# Altium PCB PCB1.PcbDoc
Units mm, origin at the board's own origin, x right, y up, seen from the top; angles counter-clockwise.
Board outline 20.7 x 29.34 mm, 2 copper layers (Top Layer, Bottom Layer); 11 components, 9 nets, 37 pads, 3 vias.
Unrouted connection lines stored in the file: 2.
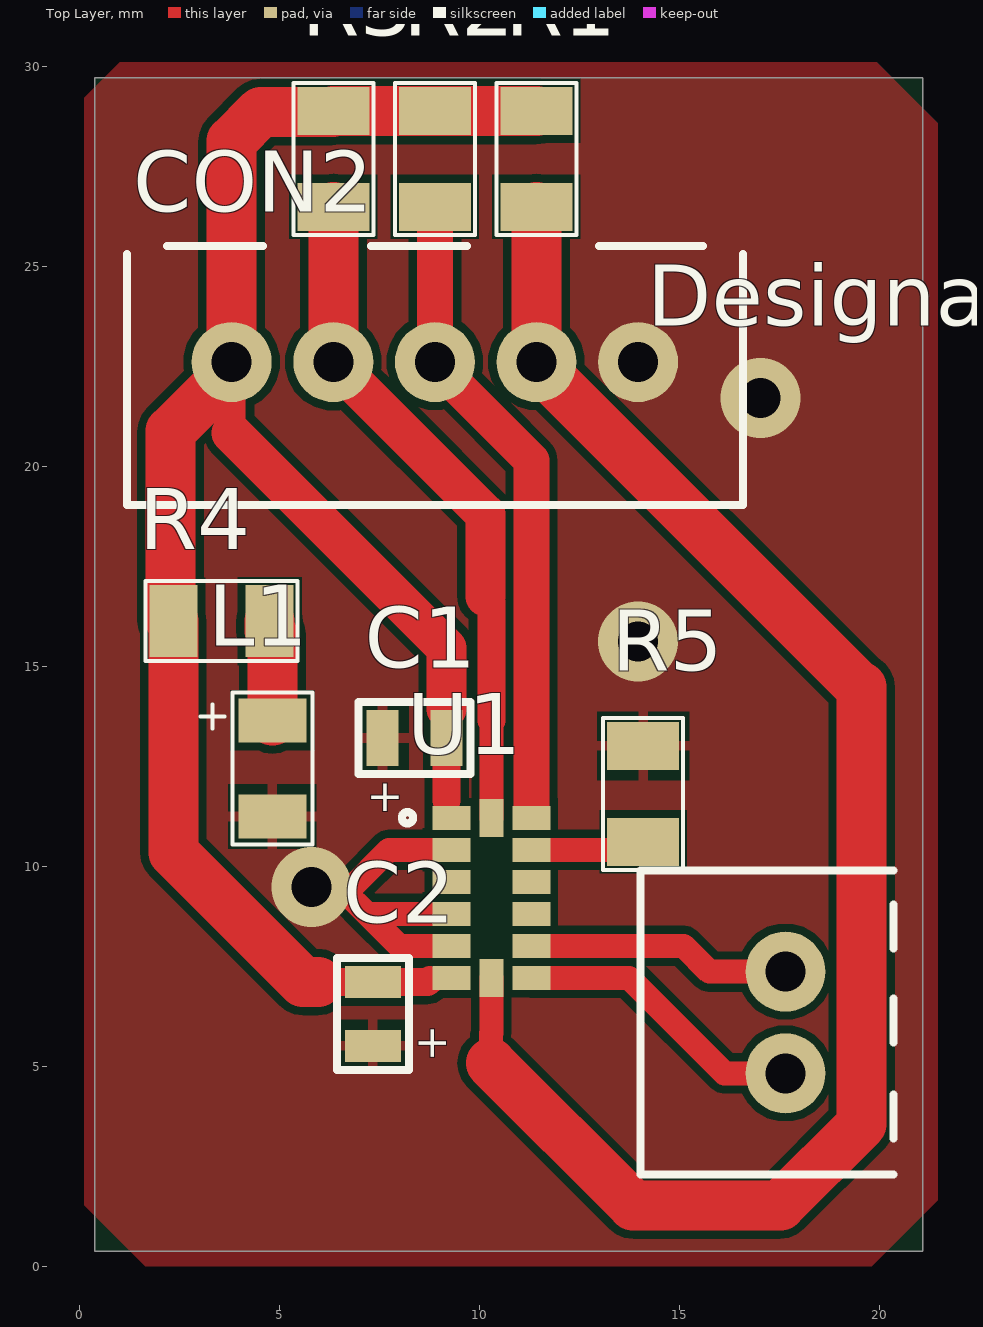
[diagram p0: Top Layer view]
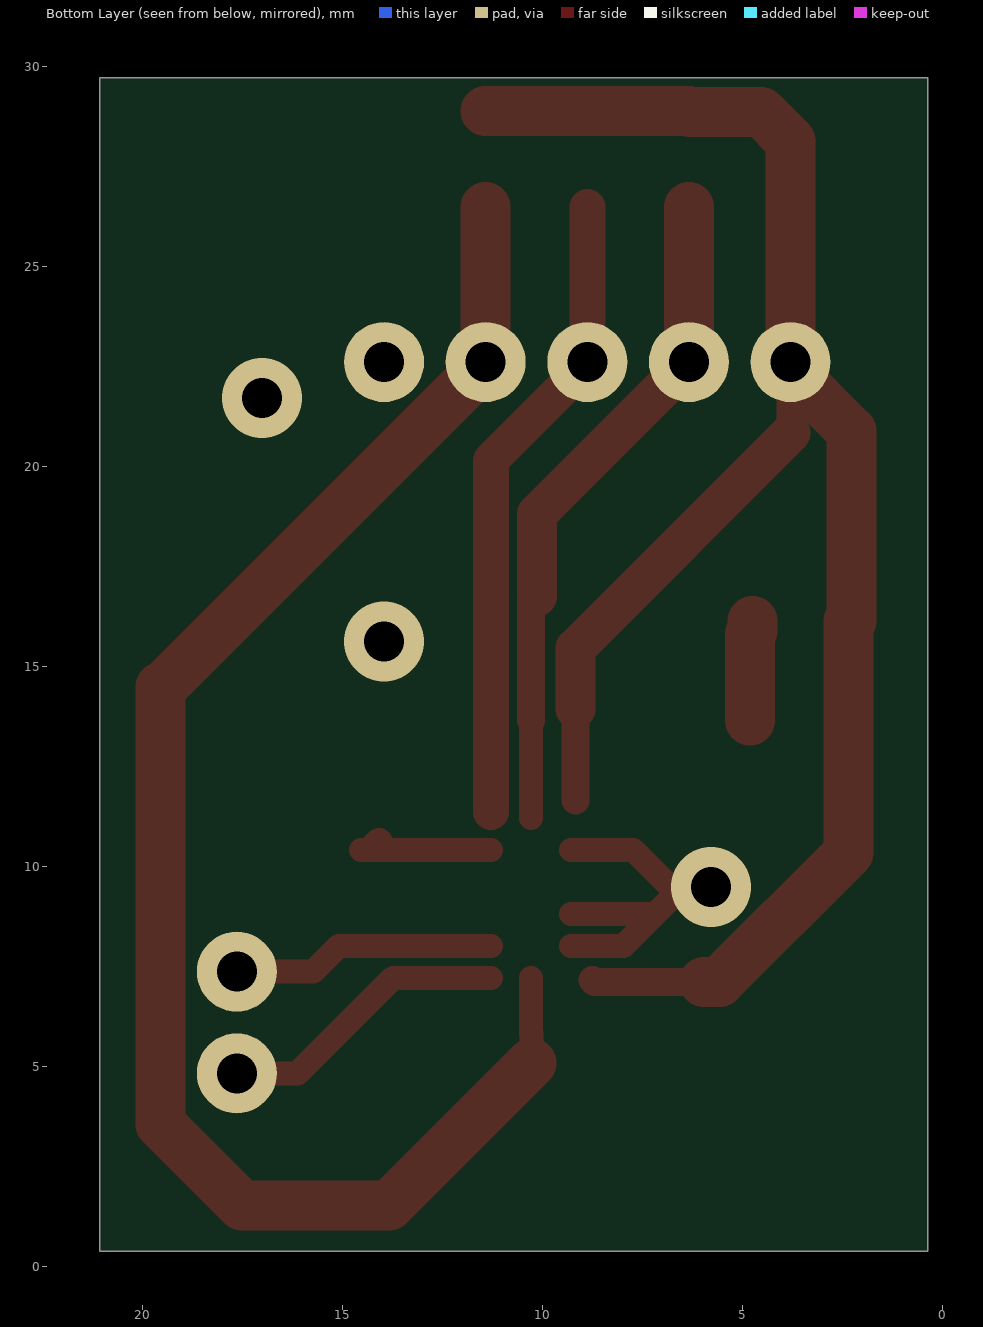
[diagram p1: Bottom Layer view, seen from below]
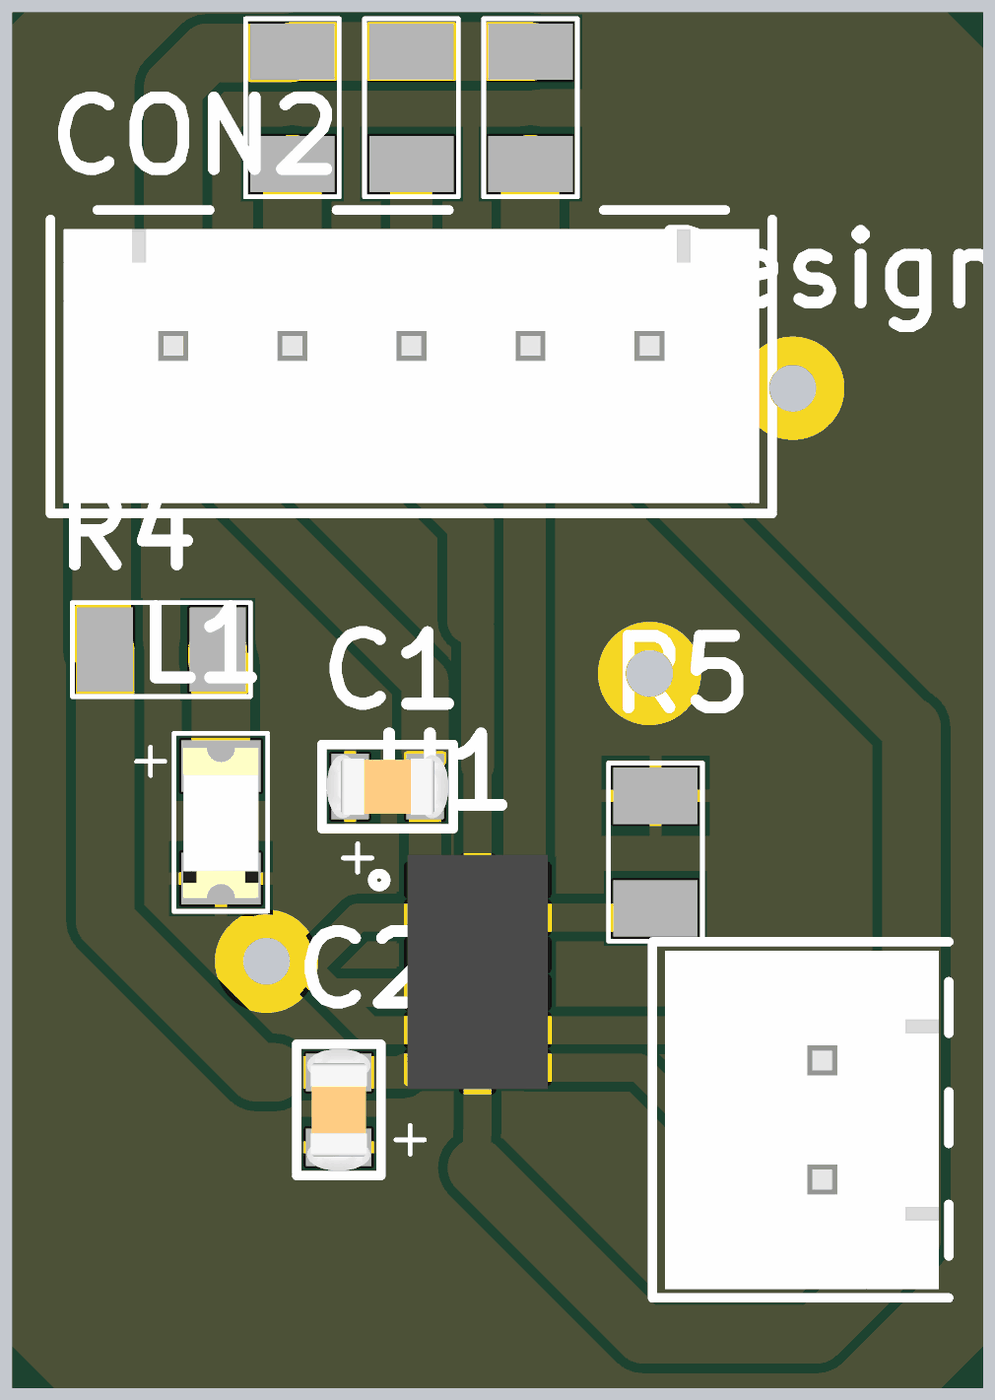
[diagram p2: 3D render of the assembled board from above, using the file's embedded part models]

## Layer stack, top to bottom
Top Solder: solder mask 0.0102, Solder Resist, Dk 3.5
Top Layer: signal copper 0.0356
Dielectric 1: dielectric 0.32, FR-4, Dk 4.8
Bottom Layer: signal copper 0.0356
Bottom Solder: solder mask 0.0102, Solder Resist, Dk 3.5

## Board outline
0.381,0.381 0.381,29.718 21.082,29.718 21.082,0.381

## Design rules (kind name [scope] priority, off if disabled: settings)
Clearance [All] p1: gap=0.2 ignorepadtopadclearanceinfootprint=FALSE
PolygonConnect [All] p1: connectstyle=Relief reliefconductorwidth=0.254 reliefentries=4 polygonreliefangle="90 Angle" airgapwidth=0.254
RoutingVias [All] p1: holewidth=0.711 width=1.27 viastyle="Through Hole" minholewidth=0.711 minwidth=1.27 maxholewidth=0.711 maxwidth=1.27
SolderMaskExpansion [All] p1: expansion=0.102 istentingtop=FALSE
Width [All] p1: maxlimit=1.5 minlimit=0.254 preferedwidth=0.254
30 further rules are at their usual default settings.

## Classes and differential pairs
component class Sheet6: C1 C2 CON2 L1 R1 R2 R3 R4 R5 U1

## Components (designator, comment, footprint, x,y, rotation, side; value= is the part's Value field where it differs from the comment)
C1 "CAP 100nF" CAP_805 8.382,13.208 r0 top
C2 "CAP 10uF" CAP_805 7.34,6.312 r90 top
CON2 "5 PIN CON" "5 PIN 2.54MM" 8.89,22.606 r180 top
Designator154 "Comment" "2 PIN 2.54MM" 17.653,6.096 r90 top
L1 "Led Red" "Led 1206" 4.826,12.446 r270 top
R1 "RES 10K 1206" RES_1206 11.43,27.686 r270 top
R2 "RES 10K 1206" RES_1206 8.89,27.686 r270 top
R3 "RES 10K 1206" RES_1206 6.35,27.686 r270 top
R4 "RES 10K 1206" RES_1206 3.556,16.129 r0 top
R5 "RES 10K 1206" RES_1206 14.097,11.811 r270 top
U1 "ADXL345BCCZ-RL" PQFN80P300X500X79-14N 10.303,9.214 r0 top

## Footprints (in the part's own frame and the unit in brackets; to place one, negate y for a bottom-side part, rotate by r counter-clockwise, add the part's x,y. Pads: shape width x height; smd on the part's side, far side on the other; paste and mask are expansions set on the pad)
"2 PIN 2.54MM" [mm]
  round 2 hole 1 mask+0.05: 1(-1.27,0) 2(1.27,0)
  silkscreen extent -3.79,-2.7 3.8,3.62, body extent -3.61,-2.49 3.61,3.35, height 7.21
"5 PIN 2.54MM" [mm]
  round 2 hole 1 mask+0.05: 1(-5.08,0) 2(-2.54,0) 3(0,0) 4(2.54,0) 5(5.08,0)
  silkscreen extent -7.7,-2.9 7.7,3.57, body extent -7.42,-2.49 7.42,3.35, height 7.21
CAP_805 [mm]
  rect 0.8x1.4 smd mask+0.05: 1(-0.8,0) 2(0.8,0)
  silkscreen extent -1.4,-0.9 1.4,0.9, body extent -1.3,-0.68 1.3,0.68, height 0.9
"Led 1206" [mm]
  rect 1.1x1.7 smd mask+0.05: 1(-1.2,0) 2(1.2,0)
  silkscreen extent -1.9,-1.8 1.9,1, body extent -1.59,-0.8 1.61,0.8, height 1.1
PQFN80P300X500X79-14N [mm]
  rect 0.95x0.6 smd: 1(-1,2) 2(-1,1.2) 3(-1,0.4) 4(-1,-0.4) 5(-1,-1.2) 6(-1,-2) 8(1,-2) 9(1,-1.2) 10(1,-0.4) 11(1,0.4) 12(1,1.2) 13(1,2)
  rect 0.6x0.95 smd: 7(0,-2) 14(0,2)
  silkscreen extent -2.24,1.86 -1.96,2.14, body extent -1.5,-2.46 1.5,2.54, height 1
RES_1206 [mm]
  rect 1.2x1.8 smd mask+0.05: 1(-1.2,0) 2(1.2,0)
  silkscreen extent -1.9,-1 1.9,1, body extent -1.57,-0.82 1.57,0.82, height 0.53

## Part data
C1 C2: library part "CAP 1uF", "0805 smd"
CON2: "2.54mm vertical connector"
U1: "Accelerometer X, Y, Z Axis Â±2g, 4g, 8g, 16g 0.05Hz ~ 1.6kHz 14-LGA (3x5)", Package="LGA -14 Analog Devices", Availability=Warning, Check_prices=https://www.snapeda.com/parts/ADXL345BCCZ-RL/Analog%20Devices%20Inc./view-part/52306/?ref=eda, MF="Analog Devices", MP=ADXL345BCCZ-RL, Price=None, Purchase-URL=https://pricing.snapeda.com/search/part/ADXL345BCCZ-RL/?ref=eda, SnapEDA_Link=https://www.snapeda.com/parts/ADXL345BCCZ-RL/Analog%20Devices%20Inc./view-part/52306/?ref=snap

## Via types
v1: diameter 2, hole 1, Top Layer to Bottom Layer, 3 vias

## Nets (pads, with @x,y where several pads share a name; then routed paths per layer and width w, separated by ;. In a path a pad name is that pad's centre, name@x,y a point inside that pad or via, vN(x,y) a via of type N, cw(c..) or ccw(c..) an arc to the next point about the centre after c; other vN are vias at no path point)
CS: CON2.2 R1.2 U1.7 | length 40
  Top Layer w0.6: 10.287,5.08 10.287,5.823 10.303,5.839 U1.7
  Top Layer w1.25: 10.287,5.08 13.843,1.524 17.526,1.524 19.558,3.556 19.558,14.478 19.517,14.478 11.43,22.565 CON2.2 R1.2
GND: C1.1 C2.1 CON2.1 L1.2 R5.1 U1.2 U1.4 U1.5 | length 9.3
  Top Layer w0.6: v1(5.799,9.482) 5.883,9.398 v1@6.604,9.398 ; U1.5 7.988,8.014 7.188,8.814 ; U1.4 7.188,8.814 ; U1.2 7.745,10.414 6.729,9.398 v1@6.604,9.398 ; v1@6.604,9.398 7.188,8.814
  other v1: 13.97,15.621 17.026,21.704
INT1: Designator154.1 U1.8 | length 7.3
  Top Layer w0.6: U1.8 13.741,7.214 16.129,4.826 Designator154.1
INT2: Designator154.2 U1.9 | length 6.6
  Top Layer w0.6: U1.9 15.102,8.014 15.75,7.366 Designator154.2
NetL1_1: L1.1 R4.2 | length 2.5
  Top Layer w1.25: R4.2 4.756,15.879 4.826,15.809 L1.1
NetR5_2: R5.2 U1.12 | length 3.4
  Top Layer w0.6: U1.12 R5.2@14.548,10.414
  Top Layer w0.7: R5.2 R5.2@14.224,10.484
SCL: CON2.4 R3.2 U1.14 | length 16.9
  Top Layer w0.6: U1.14 10.303,13.645
  Top Layer w0.7: 10.153,16.748 10.303,16.598 10.303,13.645
  Top Layer w1: CON2.4 10.153,18.803 10.153,16.748
  Top Layer w1.25: CON2.4 R3.2
SDA: CON2.3 R2.2 U1.13 | length 16.1
  Top Layer w0.9: R2.2 CON2.3 8.89,22.565 11.303,20.152 U1.13@11.303,11.364
VCC: C1.2 C2.2 CON2.5 R1.1 R2.1 R3.1 R4.1 U1.1 U1.6 | length 47.1
  Top Layer w0.7: 3.81,20.828 3.81,22.403 CON2.5 ; 5.969,7.112 C2.2 8.711,7.112 8.763,7.164 ; 9.182,11.646 C1.2 9.182,13.932
  Top Layer w1: 3.81,20.828 9.182,15.456 9.182,13.932
  Top Layer w1.25: R4.1@2.286,16.129 2.286,20.879 CON2.5@3.81,22.403 ; R4.1 2.356,10.344 5.588,7.112 5.969,7.112 ; CON2.5 3.81,28.129 4.542,28.861 6.325,28.861 R3.1 R2.1 R1.1
pads on no net: U1.3 U1.10 U1.11

## Polygon pours and split planes (outlines as drawn)
GND on Top Layer "GND_L01_P000" (solid, pour order 0): 0.127,29.21 1.016,30.099 19.939,30.099 21.463,28.575 21.463,1.651 19.812,0 1.651,0 0.127,1.524 0.127,29.083

## Other copper
Top Layer:
  pour cut-out: 9.779,8.89 9.779,8.636 9.981,8.636 10.032,8.687 10.032,7.889 10.628,7.889 10.628,10.539 10.032,10.539 10.032,9.86 9.978,9.86 9.978,9.368 10.032,9.368 10.032,8.941 9.703,8.941 9.652,8.89

## Silkscreen, mask and mechanical layers (free items; w line width, h text height)
Mechanical 1:
  the board outline again, w1

## Text inside footprints (layer, text, board x,y; h text height)
C1: Top Overlay "+" at 7.182,11.375 h0.8
C2: Top Overlay "+" at 9.173,5.112 h0.8 r90